# Altium PCB RemoteBack.PcbDoc
Units mm, origin at the board's own origin, x right, y up, seen from the top; angles counter-clockwise.
Board outline 120 x 62.5 mm, 2 copper layers (TL, BL), stack 0.872 mm thick; 6 components, 0 nets, 6 pads, 0 vias.
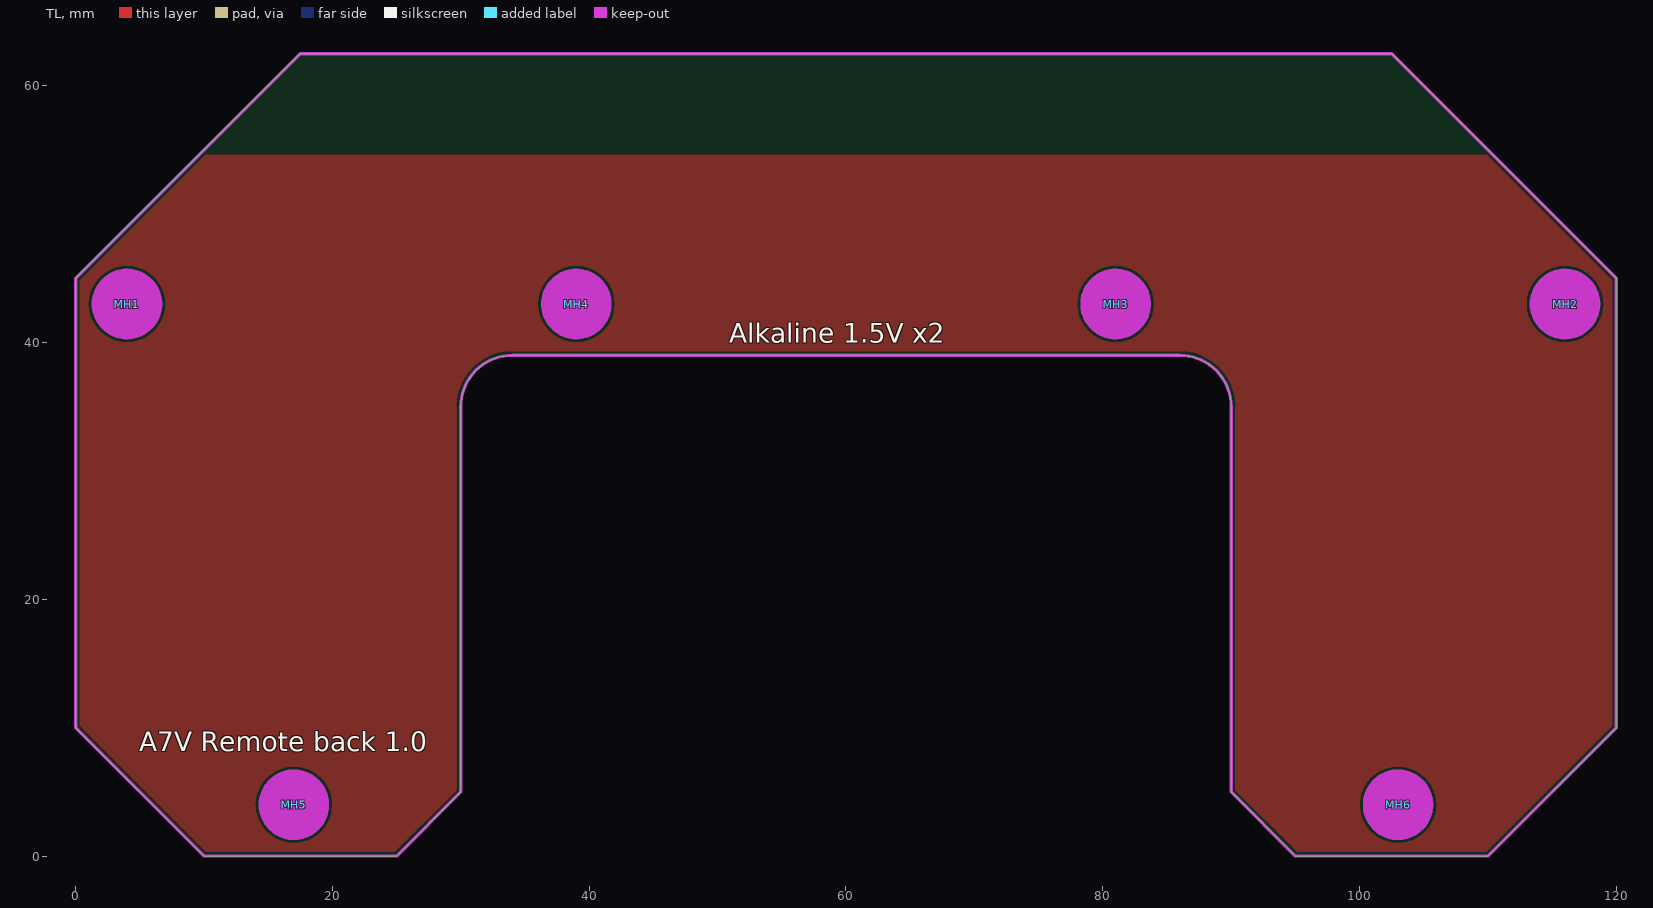
[diagram p0: TL view]
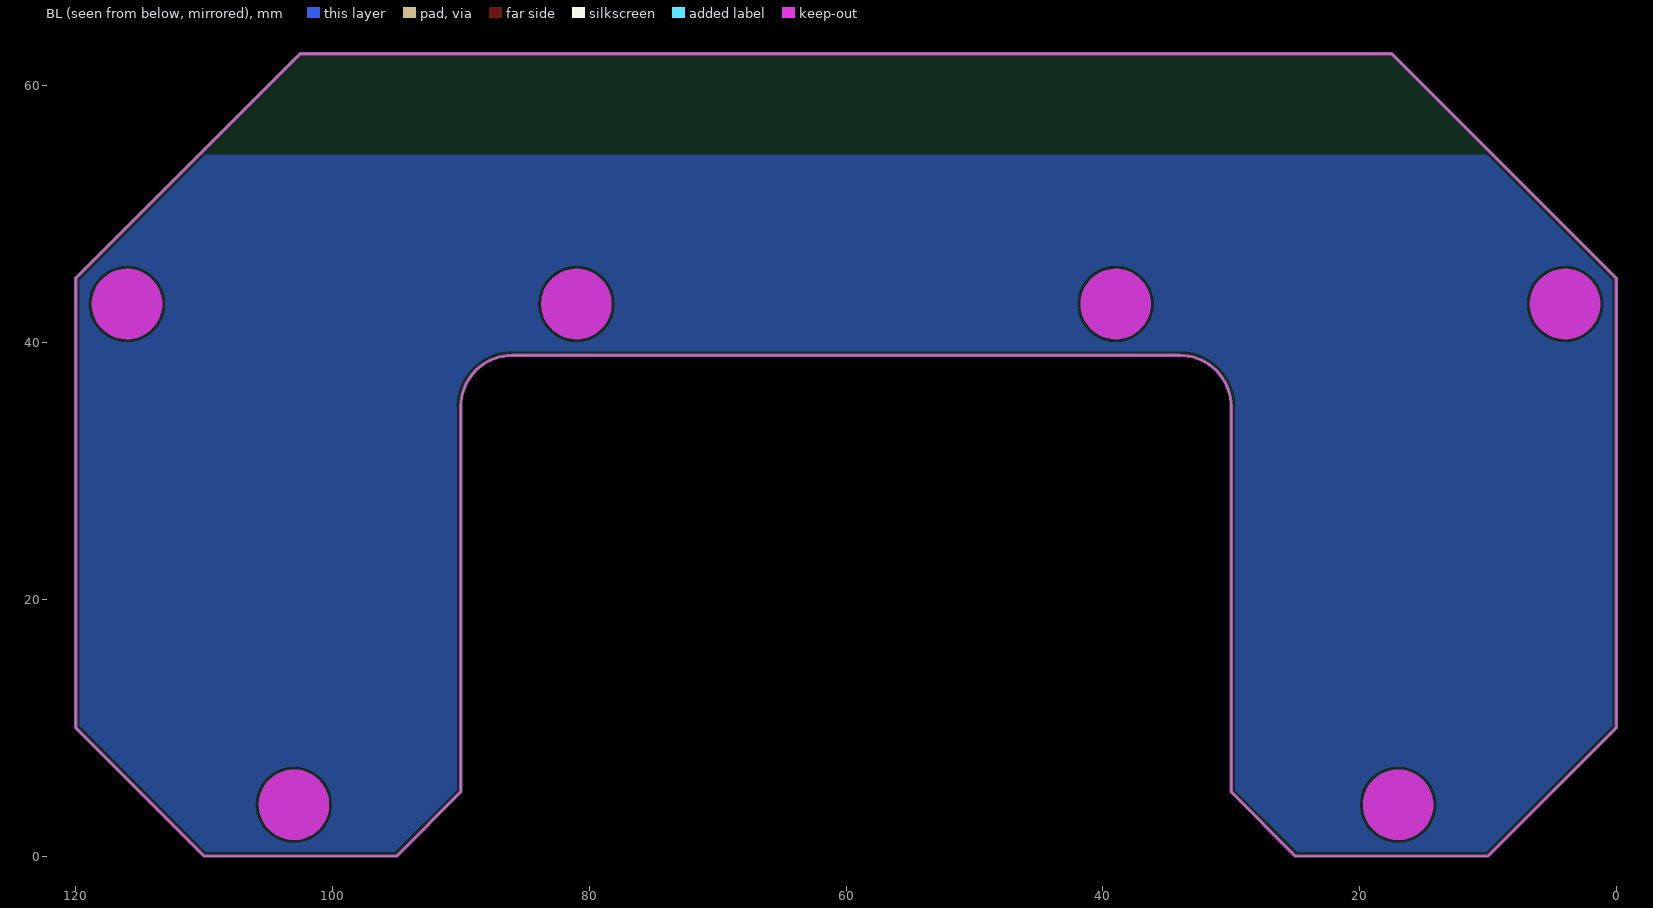
[diagram p1: BL view, seen from below]

## Layer stack, top to bottom
Top Solder: solder mask 0.01, Solder Resist, Dk 3.5
TL: signal copper 0.036
Dielectric 4: prepreg 0.8, FR-4, Dk 4.2
BL: signal copper 0.036
Bottom Solder: solder mask 0.01, Solder Resist, Dk 3.5

## Board outline
10,0 25,0 30,5 30,35 cw(c34,35) 34,39 86,39 cw(c86,35) 90,35 90,5 95,0 110,0 120,10 120,45 102.5,62.5 17.5,62.5 0,45 0,10

## Design rules (kind name [scope] priority, off if disabled: settings)
Clearance [All] p1: gap=0.2 ignorepadtopadclearanceinfootprint=TRUE except(0: Arc-Hole Track-Hole SMDPad-Hole THPad-Hole Via-Hole Fill-Hole Poly-Hole Region-Hole Text-Hole)
DiffPairsRouting DiffPairsRouting_1 [InDifferentialPair('D')] p1: maxlimit=0.4 minlimit=0.2 mostfreqgap=0.2 toplayer_minwidth=0.2 toplayer_maxwidth=0.4 toplayer_prefwidth=0.4 bottomlayer_minwidth=0.2 bottomlayer_maxwidth=0.4 bottomlayer_prefwidth=0.4 maxuncoupledlength=12.7
DiffPairsRouting [All] p2: maxlimit=0.254 minlimit=0.254 mostfreqgap=0.254 toplayer_minwidth=0.381 toplayer_maxwidth=0.381 toplayer_prefwidth=0.381 bottomlayer_minwidth=0.381 bottomlayer_maxwidth=0.381 bottomlayer_prefwidth=0.381 maxuncoupledlength=12.7
Height [All] p1: minheight=0 maxheight=150 prefheight=12.7
HoleSize [All] p1: absolutevalues=TRUE maxlimit=10 minlimit=0.3 maxpercent=80.000 minpercent=20.000
MinimumSolderMaskSliver MinimumSolderMaskSliver_1 [HasFootprint('TSQFP50P900X900X160-48N_48LQFP')] p1: minsoldermaskwidth=0.08
MinimumSolderMaskSliver [All] p2: minsoldermaskwidth=0.05
PolygonConnect [All] p1: thpad.connectstyle=Relief thpad.reliefconductorwidth=0.4 thpad.reliefentries=4 thpad.polygonreliefangle="90 Angle" thpad.airgapwidth=0.254 smdpad.connectstyle=Direct smdpad.reliefconductorwidth=0.254 smdpad.reliefentries=4 smdpad.polygonreliefangle="90 Angle" smdpad.airgapwidth=0.254 via.connectstyle=Direct via.reliefconductorwidth=0.254 via.reliefentries=4 via.polygonreliefangle="90 Angle" via.airgapwidth=0.254
RoutingVias [All] p1: holewidth=0.3 width=0.7 viastyle="Through Hole" minholewidth=0.3 minwidth=0.5 maxholewidth=1 maxwidth=2
SilkToSilkClearance [All] p1: silktosilkclearance=0
SilkToSolderMaskClearance [IsPad] p1: minsilkscreentomaskgap=0.1 clearancetoexposedcopper=TRUE
SolderMaskExpansion [All] p1: expansion=0.102
Width [All] p1: maxlimit=10 minlimit=0.2 preferedwidth=0.254
24 further rules are at their usual default settings.

## Components (designator, comment, footprint, x,y, rotation, side; value= is the part's Value field where it differs from the comment)
MH1 "2.5mm Non-Plated Hole" MTG250X550 4,43 r0 top
MH2 "2.5mm Non-Plated Hole" MTG250X550 116,43 r0 top
MH3 "2.5mm Non-Plated Hole" MTG250X550 81,43 r0 top
MH4 "2.5mm Non-Plated Hole" MTG250X550 39,43 r0 top
MH5 "2.5mm Non-Plated Hole" MTG250X550 17,4 r0 top
MH6 "2.5mm Non-Plated Hole" MTG250X550 103,4 r0 top

## Footprints (in the part's own frame and the unit in brackets; to place one, negate y for a bottom-side part, rotate by r counter-clockwise, add the part's x,y. Pads: shape width x height; smd on the part's side, far side on the other; paste and mask are expansions set on the pad)
MTG250X550 [mm]
  round 0 hole 2.5 unplated: ""(0,0)
  TL keep-out circle w2.75: c0,0 r1.375
  BL keep-out circle w2.75: c0,0 r1.375

## Part data
MH1 MH2 MH3 MH4 MH5 MH6: library part NONPART-007, BWA PN=NONPART-007, Display_Name="2.5mm Non-Plated Hole", Schematic Symbol=HOLE_UNPLATED

## Nets (pads, with @x,y where several pads share a name; then routed paths per layer and width w, separated by ;. In a path a pad name is that pad's centre, name@x,y a point inside that pad or via, vN(x,y) a via of type N, cw(c..) or ccw(c..) an arc to the next point about the centre after c; other vN are vias at no path point)
pads on no net: MH1. MH2. MH3. MH4. MH5. MH6.

## Polygon pours and split planes (outlines as drawn)
no net on BL "NONET_L02_P012" (solid, pour order 12): 30,4.987 30,36.656 32.344,39 87.653,39 90,36.653 90,4.987 94.993,-0.02 109.993,-0.02 119.993,9.98 119.993,44.98 110.342,54.63 86.793,54.63 60.993,54.63 58.993,54.63 58.465,54.63 33.392,54.63 9.643,54.63 -0.007,44.98 -0.007,9.98 9.993,-0.02 24.993,-0.02
no net on TL "NONET_L01_P014" (solid, pour order 14): 30,4.987 30,36.656 32.344,39 87.653,39 90,36.653 90,4.987 94.993,-0.02 109.993,-0.02 119.993,9.98 119.993,44.98 110.342,54.63 86.793,54.63 60.993,54.63 58.993,54.63 58.465,54.63 33.392,54.63 9.643,54.63 -0.007,44.98 -0.007,9.98 9.993,-0.02 24.993,-0.02

## Keep-outs
Keep-Out Layer:
  lines w0.254: 0,10 0,45 17.5,62.5 18.55,62.5 102.5,62.5 120,45 120,10 110,0 95,0 90,5 90,35 ccw(c86,35) 86,39 34,39 ccw(c34,35) 30,35 30,5 25,0 10,0 0,10

## Silkscreen, mask and mechanical layers (free items; w line width, h text height)
Top Overlay:
  text "Alkaline 1.5V x2" at 50.9,40 h1.5
  text "A7V Remote back 1.0" at 4.95,8.15 h1.5
MechOutline (Mech31):
  the board outline again, w0.254